# Altium PCB GMRpcb.PcbDoc
Units mil, origin at the board's own origin, x right, y up, seen from the top; angles counter-clockwise.
Board outline 6000 x 4000 mil, 2 copper layers (Top Layer, Bottom Layer); 11 components, 14 nets, 40 pads, 0 vias.
Unrouted connection lines stored in the file: 16.
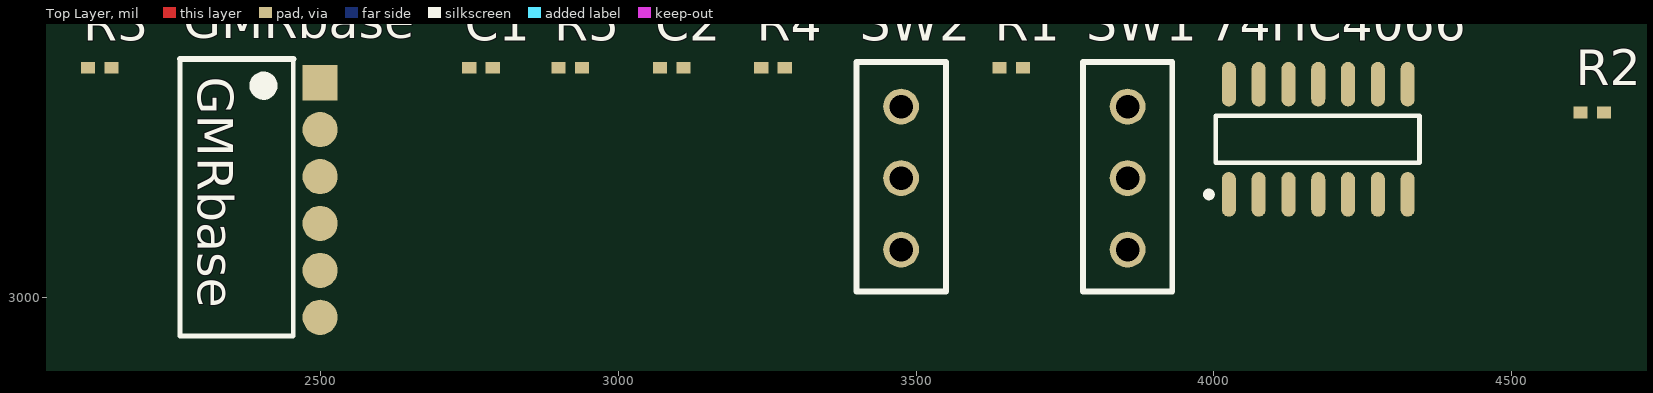
[diagram p0: Top Layer view]
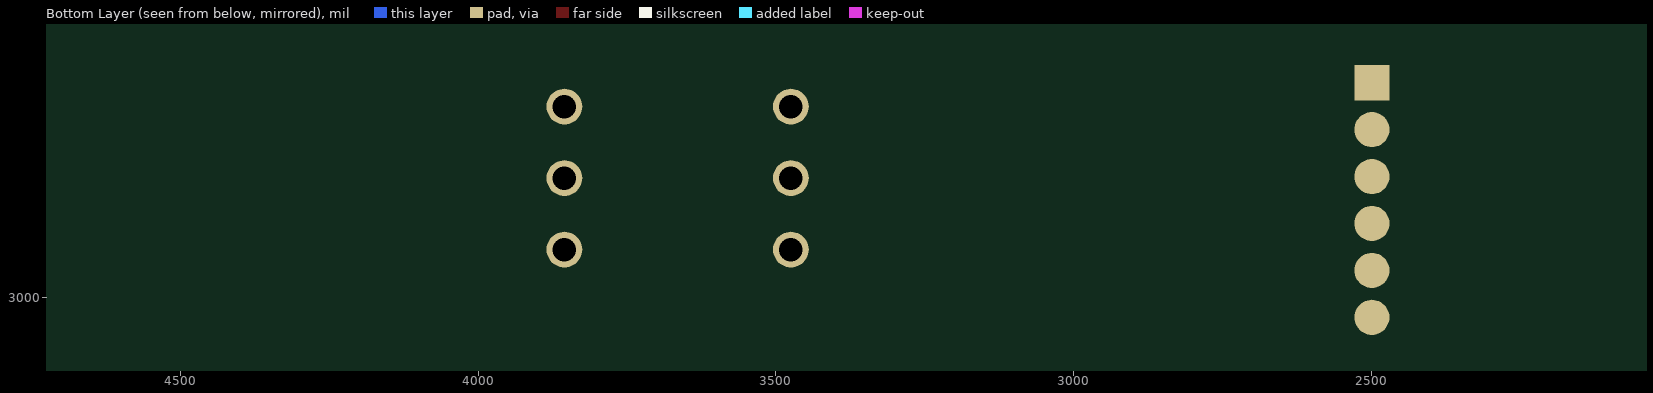
[diagram p1: Bottom Layer view, seen from below]

## Layer stack, top to bottom
Top Solder: solder mask 0.4, Solder Resist, Dk 3.5
Top Layer: signal copper 1.4
Dielectric 1: dielectric 12.6, FR-4, Dk 4.8
Bottom Layer: signal copper 1.4
Bottom Solder: solder mask 0.4, Solder Resist, Dk 3.5

## Board outline
1000,1000 7000,1000 7000,5000 1000,5000

## Design rules (kind name [scope] priority, off if disabled: settings)
Clearance [All] p1: gap=10
PolygonConnect [All] p1: connectstyle=Relief reliefconductorwidth=10 reliefentries=4 polygonreliefangle="90 Angle" airgapwidth=10
RoomDefinition GMRpcb [InComponentClass('GMRpcb')] p1: confinementstyle=ConfineIn formatcopy=TRUE lockcomponents=FALSE outline 2085,2924.96 4640,2924.96 4640,3509.96 2085,3509.96
RoutingVias [All] p1: holewidth=28 width=50 viastyle="Through Hole" minholewidth=28 minwidth=50 maxholewidth=28 maxwidth=50
SolderMaskExpansion [All] p1: expansion=4
UnpouredPolygon [All] p1: allowunpoured=FALSE
Width [All] p1: maxlimit=10 minlimit=10 preferedwidth=10
29 further rules are at their usual default settings.

## Components (designator, comment, footprint, x,y, rotation, side; value= is the part's Value field where it differs from the comment)
74HC4066 "74HC4066D" 74HC4066D -45165,52284.96 r90 top
C1 "cap0402" cap0402 8015,774.96 r0 top
C2 "cap0402" cap0402 8335,774.96 r0 top
GMRbase "GMRbase" GMRbase 49740,51729.96 r0 top
R1 "R" res0402 53435,53234.96 r0 top
R2 "R" res0402 54410,53160 r0 top
R3 "R" res0402 51905,53234.96 r0 top
R4 "R" res0402 53035,53234.96 r0 top
R5 "R" res0402 52695,53234.96 r0 top
SW1 "3p" 3p 3855,3199.96 r90 top
SW2 "3p" 3p 3475,3199.96 r90 top

## Footprints (in the part's own frame and the unit in brackets; to place one, negate y for a bottom-side part, rotate by r counter-clockwise, add the part's x,y. Pads: shape width x height; smd on the part's side, far side on the other; paste and mask are expansions set on the pad)
3p [mil]
  round 60 hole 39.37: 0(0,0) 1(-120,0) 2(120,0)
  silkscreen extent -190,-75 195,75
74HC4066D [mm]
  oval 1.9x0.6 smd: 1(-1247.458,-1249.426) 2(-1247.458,-1250.696) 3(-1247.458,-1251.966) 4(-1247.458,-1253.236) 5(-1247.458,-1254.506) 6(-1247.458,-1255.776) 7(-1247.458,-1257.046) 8(-1242.758,-1257.046) 9(-1242.758,-1255.776) 10(-1242.758,-1254.506) 11(-1242.758,-1253.236) 12(-1242.758,-1251.966) 13(-1242.758,-1250.696) 14(-1242.758,-1249.426)
  silkscreen extent -1247.58,-1257.55 -1244.11,-1248.45, body extent -1247.11,-1257.68 -1243.11,-1248.87, height 1.75
cap0402 [mm]
  rect 0.6x0.5 smd: 1(-133.723,66.294) 2(-132.723,66.294)
  body extent -133.77,65.99 -132.67,66.59, height 1.3
GMRbase [mm]
  rect 1.5x1.5 all layers, no hole: 1(-1199.896,-1228.598)
  round 1.5 all layers, no hole: 2(-1199.896,-1230.598) 3(-1199.896,-1232.598) 4(-1199.896,-1234.598) 5(-1199.896,-1236.598) 6(-1199.896,-1238.598)
  silkscreen extent -1205.87,-1239.39 -1201.04,-1227.58
res0402 [mm]
  rect 0.6x0.5 smd: 1(-1264.785,-1266.19) 2(-1263.785,-1266.19)
  body extent -1264.83,-1266.49 -1263.74,-1265.89, height 1.3

## Part data
R1 R2 R3 R4 R5: library part res0402

## Nets (pads, with @x,y where several pads share a name; then routed paths per layer and width w, separated by ;. In a path a pad name is that pad's centre, name@x,y a point inside that pad or via, vN(x,y) a via of type N, cw(c..) or ccw(c..) an arc to the next point about the centre after c; other vN are vias at no path point)
GND: R3.1
Net74HC4066_2: 74HC4066.2 R2.1
Net74HC4066_3: 74HC4066.3 GMRbase.3
Net74HC4066_4: 74HC4066.4 R4.1
Net74HC4066_13: 74HC4066.13 SW1.2
NetC1_1: C1.1 GMRbase.4 R5.1
NetC1_2: C1.2 R4.2 SW2.0
NetC2_1: C2.1 SW2.2
NetC2_2: C2.2 R5.2
NetGMRbase_1: GMRbase.1 SW1.0
NetGMRbase_2: GMRbase.2 R1.1
NetGMRbase_5: GMRbase.5 GMRbase.6 R3.2
NetR2_2: R2.2 SW1.1
VCC: 74HC4066.1 74HC4066.14
pads on no net: 74HC4066.5 74HC4066.6 74HC4066.7 74HC4066.8 74HC4066.9 74HC4066.10 74HC4066.11 74HC4066.12 R1.2 SW2.1